# Altium PCB Lauren PCB.PcbDoc
Units mil, origin at the board's own origin, x right, y up, seen from the top; angles counter-clockwise.
Board outline 6000 x 4000 mil, 2 copper layers (Top Layer, Bottom Layer); 21 components, 24 nets, 129 pads, 33 vias.
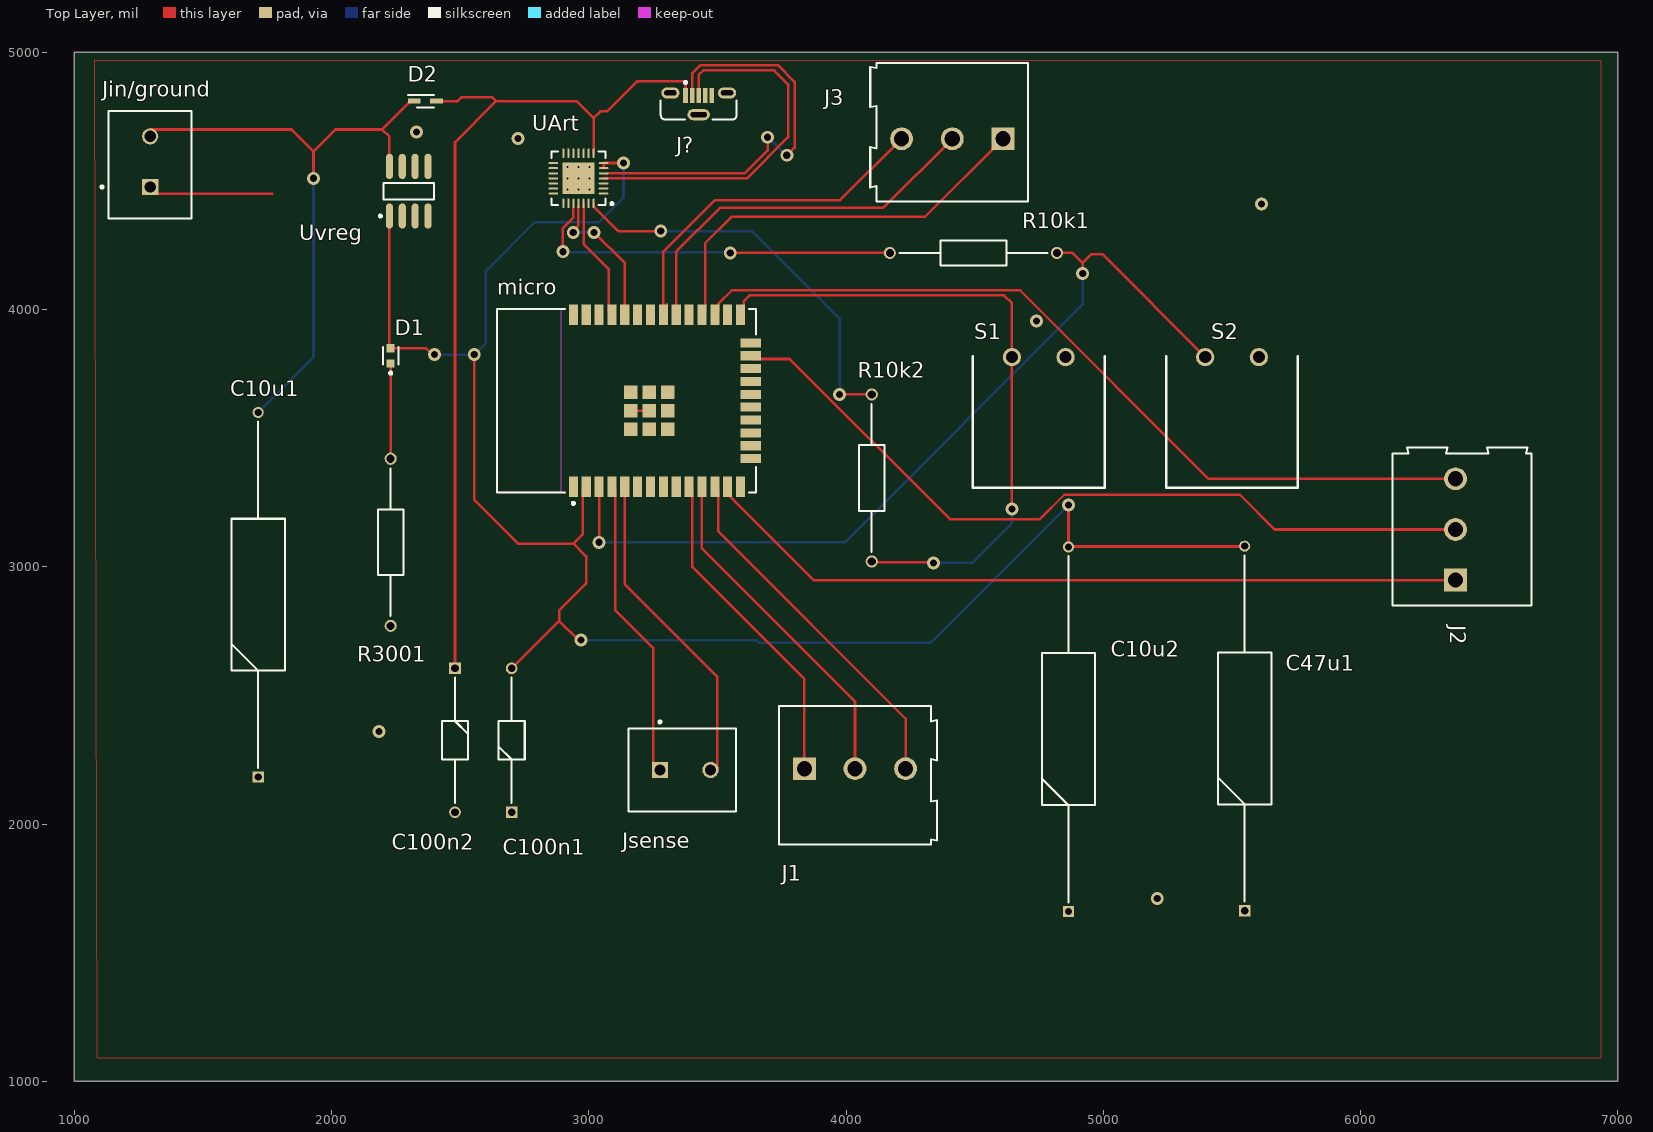
[diagram p0: Top Layer view]
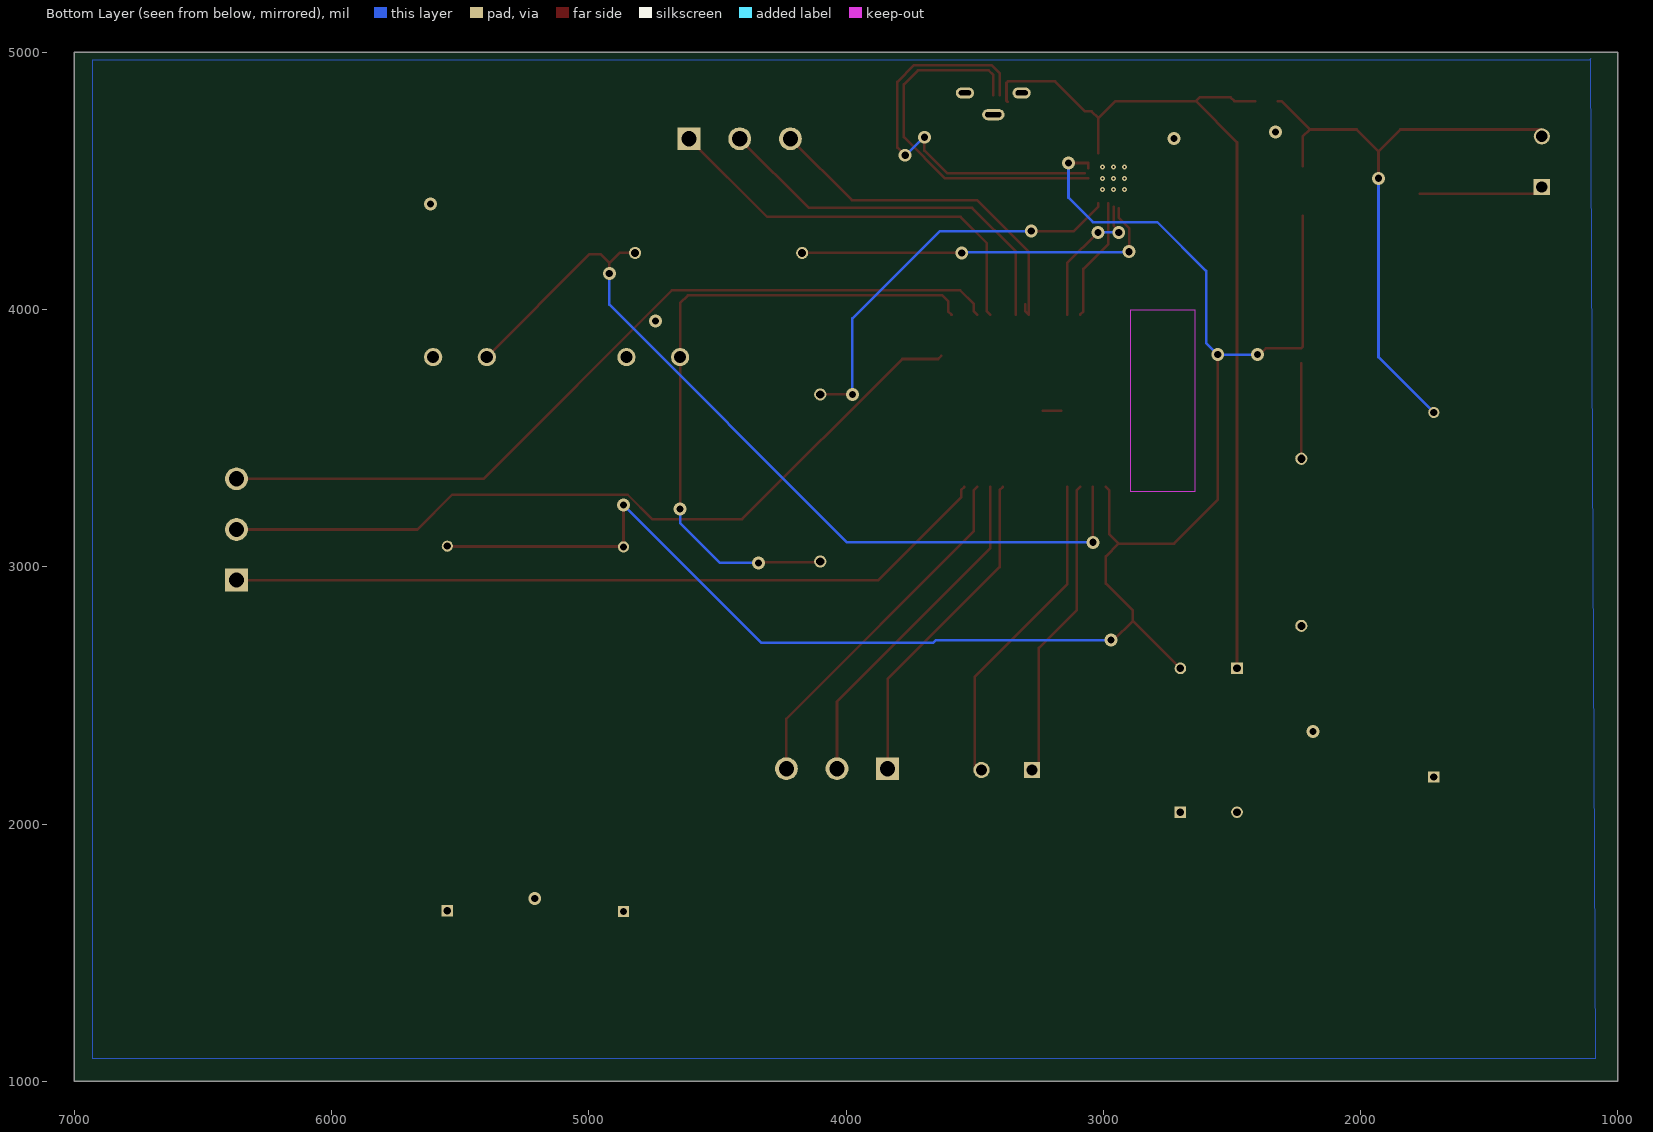
[diagram p1: Bottom Layer view, seen from below]
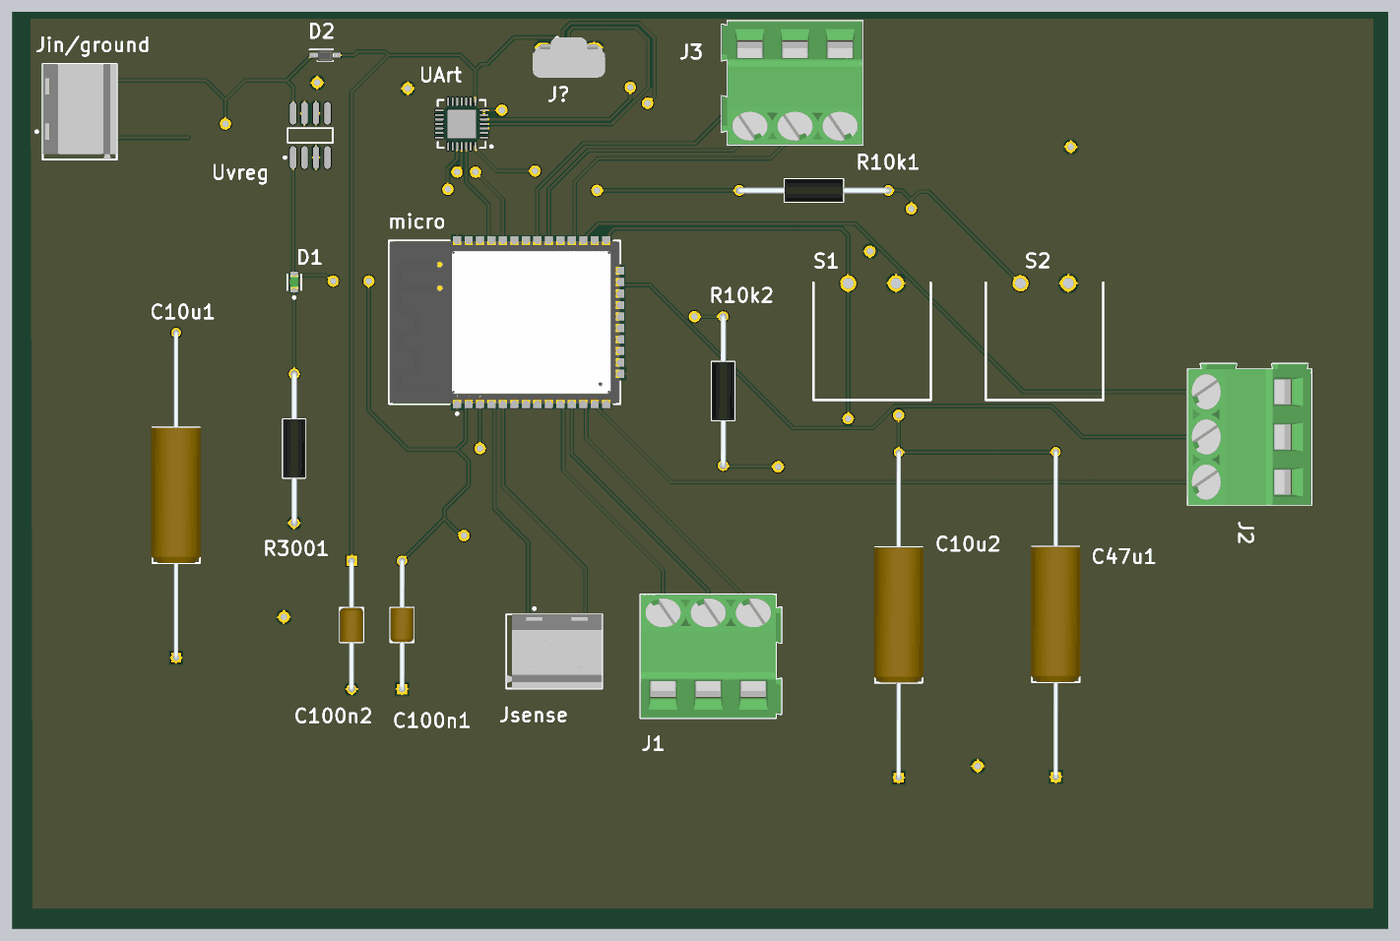
[diagram p2: 3D render of the assembled board from above, using the file's embedded part models]

## Layer stack, top to bottom
Top Solder: solder mask 0.4, Solder Resist, Dk 3.5
Top Layer: signal copper 1.4
Dielectric 1: dielectric 12.6, FR-4, Dk 4.8
Bottom Layer: signal copper 1.4
Bottom Solder: solder mask 0.4, Solder Resist, Dk 3.5

## Board outline
1000,1000 7000,1000 7000,5000 1000,5000

## Design rules (kind name [scope] priority, off if disabled: settings)
Clearance [All] p1: gap=5 ignorepadtopadclearanceinfootprint=FALSE
PolygonConnect [All] p1: connectstyle=Relief reliefconductorwidth=10 reliefentries=4 polygonreliefangle="90 Angle" airgapwidth=10
RoutingVias [All] p1: holewidth=28 width=50 viastyle="Through Hole" minholewidth=28 minwidth=50 maxholewidth=28 maxwidth=50
SolderMaskExpansion [All] p1: expansion=4 istentingtop=FALSE
Width [All] p1: maxlimit=10 minlimit=10 preferedwidth=10
30 further rules are at their usual default settings.

## Components (designator, comment, footprint, x,y, rotation, side; value= is the part's Value field where it differs from the comment)
C10u1 "106TTA050MSD" CAPPA3600W50L1500D525 1715,2182.68 r90 top
C10u2 "106TTA050MSD" CAPPA3600W50L1500D525 4865,1660 r90 top
C47u1 "106TTA050MSD" CAPPA3600W50L1500D525 5550,1662.68 r90 top
C100n1 "A104K15X7RF5UAAP" CAPPA1420W55L380D260 2700,2045.94 r90 top
C100n2 "A104K15X7RF5UAAP" CAPPA1420W55L380D260 2480,2605 r270 top
D1 "LTST-C191KGKT" FP-LTST-C191KGKT-MFG 2230,3820 r90 top
D2 "B5817WS-TP" SOD2512X115N 2365,4810 r0 top
J1 "691211720003" 691211720003 4035,2189.41 r0 top
J2 "691211720003" 691211720003 6395,3145 r90 top
J3 "691211720003" 691211720003 4413.15,4689.41 r180 top
J? "105133-0001" MOLX-105133-0001_V 3427.32,4799.76 r0 top
Jin/ground "282836-2" TECO-282836-2_V 1295,4575 r90 top (schematic designator JOut?)
Jsense "282836-2" TECO-282836-2_V 3375,2210 r0 top (schematic designator JSense)
micro "ESP32-WROOM-32" FP-ESP32-WROOM-32-MFG 3147.09,3645.35 r90 top
R10k1 "MRS25000C1002FCT00" RESAD1650W60L650D250 4820,4220 r180 top
R10k2 "MRS25000C1002FCT00" RESAD1650W60L650D250 4100,3020.39 r90 top
R3001 "MRS25000C1002FCT00" RESAD1650W60L650D250 2230,2770.39 r90 top
S1 "GPTS203211B" GPTS203211B 4749.33,3818.19 r90 top
S2 "GPTS203211B" GPTS203211B 5500.67,3818.19 r90 top
UArt "CP2102-GMR" SLAB-QFN-28-3125x3125TP_M 2960,4510 r180 top
Uvreg "LT1129CS8-3.3#TRPBF" LT-S8-8_M 2300,4460 r90 top

## Footprints (in the part's own frame and the unit in brackets; to place one, negate y for a bottom-side part, rotate by r counter-clockwise, add the part's x,y. Pads: shape width x height; smd on the part's side, far side on the other; paste and mask are expansions set on the pad)
691211720003 [mm] "5,00mm - modular - green -45¡ã entry with rising cage clamp - 03p"
  rect 2.25x2.25 hole 1.5: 1(-5,0.65)
  round 2.25 hole 1.5: 2(0,0.65) 3(5,0.65)
  silkscreen extent -7.5,-6.85 8.1,6.85, body extent -7.5,-6.85 8.1,6.85, height 15.72
CAPPA1420W55L380D260 [mm]
  rect 1.15x1.15 hole 0.75: 1(0,0)
  round 1.15 hole 0.75: 2(14.2,0)
  silkscreen extent 0.92,-1.3 13.28,1.3, body extent -0.28,-1.29 14.48,1.29, height 2.6
CAPPA3600W50L1500D525 [mm]
  rect 1.1x1.1 hole 0.7: 1(0,0)
  round 1.1 hole 0.7: 2(36,0)
  silkscreen extent 0.9,-2.63 35.1,2.63, body extent -0.25,-2.75 36.25,2.75, height 5.49
FP-ESP32-WROOM-32-MFG [mm]
  rect 2x0.9 smd paste+0 mask+0: 1(-8.5,5.26) 2(-8.5,3.99) 3(-8.5,2.72) 4(-8.5,1.45) 5(-8.5,0.18) 6(-8.5,-1.09) 7(-8.5,-2.36) 8(-8.5,-3.63) 9(-8.5,-4.9) 10(-8.5,-6.17) 11(-8.5,-7.44) 12(-8.5,-8.71) 13(-8.5,-9.98) 14(-8.5,-11.25) 25(8.5,-11.25) 26(8.5,-9.98) 27(8.5,-8.71) 28(8.5,-7.44) 29(8.5,-6.17) 30(8.5,-4.9) 31(8.5,-3.63) 32(8.5,-2.36) 33(8.5,-1.09) 34(8.5,0.18) 35(8.5,1.45) 36(8.5,2.72) 37(8.5,3.99) 38(8.5,5.26)
  rect 0.9x2 smd paste+0 mask+0: 15(-5.715,-12.25) 16(-4.445,-12.25) 17(-3.175,-12.25) 18(-1.905,-12.25) 19(-0.635,-12.25) 20(0.635,-12.25) 21(1.905,-12.25) 22(3.175,-12.25) 23(4.445,-12.25) 24(5.715,-12.25)
  rect 1.33x1.33 smd paste+0 mask+0: 39(-2.835,-2.24) 39(-2.835,-0.405) 39(-2.835,-4.075) 39(-1,-0.405) 39(-1,-4.075) 39(-1,-2.24) 39(0.835,-0.405) 39(0.835,-4.075) 39(0.835,-2.24)
  Keep-Out Layer region: -9,6.45 9,6.45 9,12.75 -9,12.75
  Keep-Out Layer region: -9,6.45 9,6.45 9,12.75 -9,12.75
  silkscreen extent -10.25,-12.8 9.05,12.8, body extent -9.6,-13.35 9.6,12.9, height 0.25
FP-LTST-C191KGKT-MFG [mm]
  rect 0.8x0.8 smd paste+0 mask+0: 1(-0.75,0) 2(0.75,0)
  silkscreen extent -1.82,-0.77 0.85,0.77, body extent -1.25,-0.55 1.25,0.55, height 0.25
GPTS203211B [mm]
  round 1.8 hole 1.2: 1(-0.081,-2.65) 2(-0.081,2.65)
  silkscreen extent -13,-6.5 0,6.5
LT-S8-8_M [mm] "SOIC, 8-Leads, Body 4.9x3.9mm, Pitch 1.27mm, IPC Low Density"
  oval 2.5x0.7 smd: 1(-2.45,1.905) 2(-2.45,0.635) 3(-2.45,-0.635) 4(-2.45,-1.905) 5(2.45,-1.905) 6(2.45,-0.635) 7(2.45,0.635) 8(2.45,1.905)
  silkscreen extent -2.57,-2.5 0.8,2.93, body extent -2,-2.5 2,2.5, height 1.76
MOLX-105133-0001_V [mm] "Micro USB B, 5-Leads, Pitch 0.65mm"
  rect 0.45x1.5 smd: 1(-1.3,0.825) 2(-0.65,0.825) 3(0,0.825) 4(0.65,0.825) 5(1.3,0.825)
  oval 1.8x1.1 hole 0.5 slot 1.2 at 0 deg: 6(-2.8,1.075) 7(2.8,1.075)
  oval 2.2x1.1 hole 0.5 slot 1.6 at 0 deg: 8(0,-1.075)
  silkscreen extent -3.75,-1.56 3.75,2.25, body extent -4.02,-2.22 4,2.23, height 7.51
RESAD1650W60L650D250 [mm]
  round 1.2 hole 0.8: 1(0,0) 2(16.5,0)
  silkscreen extent 0.95,-1.25 15.55,1.25, body extent -0.3,-1.24 16.8,1.24, height 2.5
SLAB-QFN-28-3125x3125TP_M [mm] "QFN, 28-Leads, Body 5x5mm, Pitch 0.5mm, Thermal Pad 3.13x3.13mm, IPC Low Density"
  oval 0.95x0.2 smd: 1(-2.475,1.5) 2(-2.475,1) 3(-2.475,0.5) 4(-2.475,0) 5(-2.475,-0.5) 6(-2.475,-1) 7(-2.475,-1.5) 15(2.475,-1.5) 16(2.475,-1) 17(2.475,-0.5) 18(2.475,0) 19(2.475,0.5) 20(2.475,1) 21(2.475,1.5)
  oval 0.2x0.95 smd: 8(-1.5,-2.475) 9(-1,-2.475) 10(-0.5,-2.475) 11(0,-2.475) 12(0.5,-2.475) 13(1,-2.475) 14(1.5,-2.475) 22(1.5,2.475) 23(1,2.475) 24(0.5,2.475) 25(0,2.475) 26(-0.5,2.475) 27(-1,2.475) 28(-1.5,2.475)
  rect 3.13x3.13 smd: 29(0,0)
  silkscreen extent -3.42,-2.65 2.65,2.65, body extent -2.5,-2.5 2.5,2.5, height 1
SOD2512X115N [mm]
  rect 1.25x0.5 smd: 1(-1.1,0) 2(1.1,0)
  silkscreen extent -1.73,-0.63 0.85,0.63, body extent -1.25,-0.63 1.25,0.63, height 1.15
TECO-282836-2_V [mm] "Female Header, Pitch 5mm, 1 x 2 Position, Height 10mm"
  rect 1.6x1.6 hole 1.1: 1(-2.5,0)
  round 1.6 hole 1.1: 2(2.5,0)
  silkscreen extent -5.6,-4.1 5,4.87, body extent -5.6,-4.1 5,4.1, height 10

## Part data
C10u1 C10u2 C47u1: "Capacitor Polarised", Manufacturer_Name="Cornell Dubilier", Mouser Part Number=598-106TTA050MSD, Arrow Part Number=106TTA050MSD, Arrow Price/Stock=https://www.arrow.com/en/products/106tta050msd/illinois-capacitor?region=nac, Datasheet Link=https://www.mouser.co.uk/datasheet/2/88/TTA_series-552998.pdf, Manufacturer_Part_Number=106TTA050MSD, Mouser Price/Stock=https://www.mouser.com/Search/Refine.aspx?Keyword=598-106TTA050MSD
C100n1 C100n2: "Capacitor", Manufacturer_Name=Vishay, Mouser Part Number=594-A104K15X7RF5UAAP, Datasheet Link=https://www.vishay.com/docs/45249/apseries.pdf, Manufacturer_Part_Number=A104K15X7RF5UAAP, Mouser Price/Stock=https://www.mouser.co.uk/ProductDetail/Vishay-BC-Components/A104K15X7RF5UAAP?qs=DPoM0jnrROUJ7499VET5BQ%3D%3D
D1: library part CMP-2000-05198-2, "LED GREEN CLEAR SMD", Case Code (Imperial)=0603, Case Code (Metric)=1608, Color=Green, Forward Current=30mA, Forward Voltage=2V, Lens Color=Colorless, Max Operating Temperature=85°C, Max Power Dissipation=75mW, Min Operating Temperature=-55°C, Package Quantity=1, Reverse Voltage=5V, Test Current=20mA, Case/Package=0603, Depth=0.8mm, Dominant Wavelength=571nm, Height=0.55mm, Illumination Color=Green, Lead Free="Lead Free", Length=1.6mm, Lens Style=Rectangular, Lens Transparency=Clear, Luminous Intensity=35mcd, Mount="Surface Mount", Number of Elements=1, Number of LEDs=1, Number of Pins=2, Packaging="Tape and Reel", Power Dissipation=75mW, Power Rating=75mW, Radiation Hardening=No, Viewing Angle=130°, Wavelength=574nm, Width=0.8mm
D2: "Schottky Diode", Manufacturer_Name="Micro Commercial Components (MCC)", Mouser Part Number=833-B5817WS-TP, Arrow Part Number=B5817WS-TP, Arrow Price/Stock=https://www.arrow.com/en/products/b5817ws-tp/micro-commercial-components?region=europe, Datasheet Link=https://www.mouser.co.uk/datasheet/2/258/B5817WS-B5819WS(SOD-323)-V2-1626103.pdf, Height=1.15mm, Manufacturer_Part_Number=B5817WS-TP, Mouser Price/Stock=https://www.mouser.co.uk/ProductDetail/Micro-Commercial-Components-MCC/B5817WS-TP?qs=SdqRYZZ9IxCAZAlW9BKhPg%3D%3D
J1 J2 J3: library part CMP-1502-02525-1, "Serie 211 - 5.00 mm 45deg Entry Modular with Rising Cage Clamp - 15.50 mm Height WR-TBL, 3 pin", Manufacturer="Wurth Elektronik", Operating Temperature=-40to105degC, Datasheet URL=http://katalog.we-online.de/em/datasheet/6912117200xx.pdf, Manufacturer URL=http://www.we-online.de, Mounting Technology=THT, Package Reference=691211720003, Packaging=Box, Part Number=691211720003, Pin Number=3, Pitch=5.00mm, Publisher=WurthElektronik
J?: library part CMP-2000-05829-1, "Micro-USB B Receptacle, Vertical, -30 to 85 degC, 5-Pin SMD, RoHS, Tape and Reel", Color=Black, Current Rating=1.8A, Flammability Rating=UL94V-0, Manufacturer=Molex, Package Description="5-Pin Surface Mount Device, Pitch 0.65 mm", Package Version="Rev. C, 11/2015", Voltage - Max=30V, Voltage Rating=30VAC, Brand=Molex, Connector Type=MicroUSBTypeBReceptacle, Contact Material=CopperAlloy, Contact Plating=Gold, Datasheet URL=http://www.molex.com/webdocs/datasheets/pdf/en-us/1051330001_IO_CONNECTORS.pdf, Datasheet Version=03/2016, Factory Pack Quantity=6000, Gender=Receptacle, Manufacturer URL=http://www.molex.com/, Mounting Angle=Vertical, Mounting Style=SMD/SMT, Mounting Technology=SurfaceMount, Number of Ports=1, Package Reference=105133-0001, Package URL=http://www.molex.com/pdm_docs/sd/1051330001_sd.pdf, Packaging=Reel, PartNumber=105133-0001, Product=MicroUSBTypeBConnectors, Product Category=USBConnectors, RoHS=Details, Series=105133, Standard=USB, Termination Style=SolderTail
Jin/ground Jsense: library part CMP-1684-00017-1, "Female Header, Pitch 5 mm, 1 x 2 Position, Height 10 mm, Tail Length 3.5 mm, Rohs, Bulk", Color=Green, Current=13.5A, Manufacturer="TE Connectivity", Package Description="Female Header, Pitch 5 mm, 1 x 2 Position, Height 10 mm, Tail Length 3.5 mm", Package Reference=THD, Standard Package=300, Voltage=300V, 3D Model=282836-2.pdf, Category=Connectors,Interconnects, Clamp Material - Plating=Brass-NickelPlated, Contact Material - Plating=Brass-TinPlated, Datasheet URL=http://www.te.com.cn/commerce/DocumentDelivery/DDEController?Action=showdoc&DocId=Catalog+Section%7F1308389_EUROSTYLE_TERMINAL_BLOCKS%7F0607%7Fpdf%7FEnglish%7FENG_CS_1308389_EUROSTYLE_TERMINAL_BLOCKS_0607.pdf%7F282836-2, Dynamic Catalog=BuchananSeries, Family=TerminalBlocks-WiretoBoard, Featured Product=EurostyleTerminalBlockConnectors, Features=Interlocking(Side), Housing Material=Polyamide(PA66),Nylon6/6, Manufacturer URL=http://www.te.com, Mating Orientation=HorizontalwithBoard, Mounting Type=ThroughHole, Number of Levels=1, Other Names="5ULV-02B / A98076", Packaging=Bulk, Pitch="0.197\"(5.00mm)", Positions Per Level=2, Product Training Modules=Wire-to-BoardEurostyleTerminalBlocks, RoHS Information=282836-2StatementofCompliance, Screw Material - Plating=Brass-NickelPlated, Screw Thread=M3, Series=Buchanan, Torque - Screw=0.68Nm(6Lb-In), Wire Gauge=16-30AWG, Wire Termination=Screw-RisingCageClamp
micro: library part CMP-194065-000008-1, "RX TXRX MOD WIFI SURFACE MOUNT", Case/Package=SMD/SMT, Frequency=2.5GHz, Max Operating Temperature=85°C, Min Operating Temperature=-40°C, Operating Supply Voltage=3.6V, Package Quantity=550, Data Rate=150Mbps, Mount="Surface Mount", Packaging="Cut Tape", Sensitivity=-98dBm, Weight=0.088185oz
R10k1 R10k2 R3001: "Resistor", Manufacturer_Name=Vishay, Mouser Part Number=594-MRS25000C1002FCT, Arrow Part Number=MRS25000C1002FCT00, Arrow Price/Stock=https://www.arrow.com/en/products/mrs25000c1002fct00/vishay?region=nac, Datasheet Link=http://www.vishay.com/docs/28724/mrs16m25.pdf, Manufacturer_Part_Number=MRS25000C1002FCT00, Mouser Price/Stock=https://www.mouser.co.uk/ProductDetail/Vishay-BC-Components/MRS25000C1002FCT00?qs=H30XFsNYD%2FEwip42ZXddDQ%3D%3D
S1 S2: "Switch", Manufacturer_Name="CW Industries", Mouser Part Number=629-GPTS203211B, Datasheet Link=http://switches-connectors-custom.cwind.com/Asset/GPTS203211BR2.pdf, Manufacturer_Part_Number=GPTS203211B, Mouser Price/Stock=https://www.mouser.co.uk/ProductDetail/CW-Industries/GPTS203211B?qs=sajaCoHCXPR%252BmLwibobs6Q%3D%3D
UArt: library part CMP-2000-04924-1, "Single-Chip USB to URAT Bridge, 3.3 V, -40 to 85 degC, 28-Pin QFN, RoHS, Tape and Reel", Manufacturer="Silicon Labs", Operating Supply Voltage (Max)=3.6V, Operating Supply Voltage (Min)=3V, Operating Supply Voltage (Typ)=3.3V, Operating Temperature (Max)=85C, Operating Temperature (Min)=-40C, Operating Temperature Classification=Industrial, Package Description="28-Pin Quad-Flat No-Leads Package, Body 5 x 5 mm, Pitch 0.5 mm", Package Reference=QFN-28, Package Type=QFNEP, Supply Current=26mA, Data Rate=1000kbps, Datasheet URL=http://www.mouser.com/ds/2/368/CP2102-9-247052.pdf, Datasheet Version="Rev. 1.6, 12/2013", Interface Circuit Standard 1=RS-232, Manufacturer URL=http://www.silabs.com/, Mounting=SurfaceMount, Number Of Channels=1, Package URL=http://www.silabs.com/Support%20Documents/TechnicalDocs/C8051T61x.pdf, Packaging=TapeandReel, Pin Count=28, Rad Hardened=No, Transmitter and Receiver FIFO Counter=No
Uvreg: library part CMP-0476-01546-1, "Micropower Low Dropout Regulator with Shutdown, 4.15 to 30 V Vin, 3.3 V Vout, 8-pin SOIC (S8-8), 0 to 125 degC, Pb-Free, Tape and Reel", Dropout Voltage(V)=0.45, Manufacturer="Linear Technology", Output Voltage="3.3 V", Shutdown Current(uA)=16, ComponentLink1Description="Manufacturer URL", ComponentLink1URL=http://www.linear.com/, ComponentLink2Description=Datasheet, ComponentLink2URL=http://cds.linear.com/docs/en/datasheet/112935ff.pdf, ComponentLink3Description="Package Specification", ComponentLink3URL=http://cds.linear.com/docs/en/packaging/05081610_G_SO8.pdf, DatasheetVersion="Rev. F", Discrete Pass Element=no, Iout(mA)=700, Isupply(mA)=0.05, Mounting Technology="Surface Mount", Number of Outputs=1, PackageDescription="8-Pin Plastic Small Outline (Narrow .150 Inch), Body 4.9 x 3.9 mm, Pitch 1.27 mm", PackageReference=S8-8, PackageVersion="Rev. G, 03/2012", Packing="Tape and Reel", PartNumber=LT1129CS8-3.3#TRPBF, PSRR(dB)=64, RoHS=TRUE, Vin Max(V)=30, Vin Min(V)=4.15

## Via types
v1: diameter 50, hole 28, Top Layer to Bottom Layer, 24 vias
v2: diameter 19.68, hole 7.87, Top Layer to Bottom Layer, 9 vias

## Nets (pads, with @x,y where several pads share a name; then routed paths per layer and width w, separated by ;. In a path a pad name is that pad's centre, name@x,y a point inside that pad or via, vN(x,y) a via of type N, cw(c..) or ccw(c..) an arc to the next point about the centre after c; other vN are vias at no path point)
GND: C10u1.1 C10u2.1 C47u1.1 C100n1.1 C100n2.2 J?.5 J?.6 J?.7 J?.8 Jin/ground.1 micro.1 micro.15 micro.38 micro.39 R3001.1 S1.1 S2.1 UArt.3 UArt.29 Uvreg.3 Uvreg.6 Uvreg.7 | length 547.2
  Top Layer w10: Jin/ground.1@1295,4450 1770,4450 ; micro.39@3163.03,3605.98 micro.39@3235.28,3605.98
  other v1: 5210,1710 2185,2360 4740,3955 5615,4410 2725,4665 2330,4690
  other v2: 2916.69,4466.69 2960,4466.69 3003.31,4466.69 2916.69,4510 2960,4510 3003.31,4510 2916.69,4553.31 2960,4553.31 3003.31,4553.31
NetC10u1_2: C10u1.2 D2.1 Jin/ground.2 Uvreg.8 | length 2401.9
  Top Layer w10: Jin/ground.2@1295,4700 1845,4700 1930,4615 ; v1(1930,4510) 1930,4615 ; Uvreg.8 2225,4671.93 2196.93,4700 ; D2.1 2306.93,4810 2196.93,4700 ; 1930,4615 2015,4700 2196.93,4700
  Bottom Layer w10: C10u1.2 1930,3815 v1(1930,4510)
NetC10u2_2: C10u2.2 C47u1.2 C100n1.2 D1.2 micro.2 UArt.6 UArt.7 Uvreg.1 | length 7053.8
  Top Layer w10: Uvreg.1 2225,3854.53 D1.2 2367.96,3849.53 2392.49,3825 v1(2400,3825) ; v1(2555,3825) 2555,3260 2725,3090 2940,3090 ; C100n1.2 2885,2790 ; v1(2970,2715) 2960,2715 2885,2790 ; micro.2 2977.28,3297.99 2977.28,3127.28 2940,3090 ; UArt.6 UArt.7 3057.91,4569.53 3134.53,4569.53 v1(3135,4570) ; v1(4865,3240) C10u2.2 4866.34,3078.66 5548.66,3078.66 C47u1.2 ; 2885,2790 2885,2830 2990,2935 2990,3040 2940,3090
  Bottom Layer w10: v1(2400,3825) v1(2555,3825) 2600,3870 2600,4150 2790,4340 3040,4340 3135,4435 v1(3135,4570) ; v1(2970,2715) 3650.41,2715 3660.41,2705 4330,2705 v1(4865,3240)
NetC100n2_1: C100n2.1 D2.2 J?.1 UArt.8 | length 3552.1
  Top Layer w10: D2.2 2490,4810 2505,4825 2625,4825 2640,4810 ; C100n2.1 2480,4650 2640,4810 ; UArt.8 3019.06,4744.06 ; J?.1@3372.28,4807.72 3376.14,4811.57 J?.1 3376.14,4881.14 3370.28,4887 3187,4887 3070,4770 3045,4770 3019.06,4744.06 ; 2640,4810 2953.11,4810 3019.06,4744.06
NetD1_1: D1.1 R3001.2 | length 370.5
  Top Layer w10: R3001.2 D1.1
NetJ1_1: J1.1 micro.10 | length 1281.3
  Top Layer w10: micro.10 3402.72,3297.99 3402.72,2999.15 3838.15,2563.72 J1.1
NetJ1_2: J1.2 micro.11 | length 1342.2
  Top Layer w10: micro.11 3440,3071.28 4035,2476.28 J1.2
NetJ1_3: J1.3 micro.12 | length 1403
  Top Layer w10: micro.12 3502.72,3297.99 3502.72,3138.35 4231.85,2409.21 J1.3
NetJ2_1: J2.1 micro.13 | length 2996.2
  Top Layer w10: micro.13 3552.72,3297.99 3552.72,3269.69 3874.26,2948.15 J2.1
NetJ2_2: J2.2 micro.23 | length 3098.5
  Top Layer w10: micro.23 3642.09,3807.64 3780.79,3807.64 4403.43,3185 4753.43,3185 4848.43,3280 5530.79,3280 5665.79,3145 J2.2
NetJ2_3: J2.3 micro.27 | length 3239
  Top Layer w10: micro.27 3502.72,3992.72 3502.72,4021.02 3556.7,4075 4676.57,4075 5409.72,3341.85 J2.3
NetJ3_1: J3.1 micro.28 | length 1608.5
  Top Layer w10: micro.28 3452.72,3992.72 3452.72,4257.72 3555,4360 4306.18,4360 J3.1
NetJ3_2: J3.2 micro.30 | length 1499.9
  Top Layer w10: micro.30 3340,4225 3510,4395 4144.33,4395 J3.2
NetJ3_3: J3.3 micro.31 | length 1399.3
  Top Layer w10: 3302.72,4021.02 3302.72,3992.72 micro.31 3290,4225 3490,4425 3977.48,4425 J3.3
NetJ?_2: J?.2 UArt.5 | length 1637
  Top Layer w10: UArt.5@3071.14,4530 3606.72,4530 3695,4618.28 v1(3695,4670) ; J?.2 3401.73,4916.73 3435,4950 3735,4950 3800,4885 3800,4630 v1(3770,4600)
  Bottom Layer w10: v1(3695,4670) 3697.5,4670 3767.5,4600 v1(3770,4600)
NetJ?_3: J?.3 UArt.4 | length 1446.7
  Top Layer w10: UArt.4 3615,4510 3775,4670 3775,4875 3720,4930 3445,4930 3427.32,4912.32 J?.3
NetJsense_1: Jsense.1 micro.4 | length 1167
  Top Layer w10: micro.4 3102.72,3297.99 3102.72,2832.03 3250,2684.74 Jsense.1@3250,2210
NetJsense_2: Jsense.2 micro.5 | length 1249.8
  Top Layer w10: micro.5 3140,2931.4 3500,2571.4 Jsense.2@3500,2210
Netmicro_3: micro.3 R10k1.1 S2.2 | length 3412.7
  Top Layer w10: v1(3040,3095) micro.3 ; R10k1.1 4880,4220 4920,4180 ; v1(4920,4140) 4920,4180 ; S2.2 4996.34,4215 4955,4215 4920,4180
  Bottom Layer w10: v1(3040,3095) 3996.32,3095 4920,4018.68 v1(4920,4140)
Netmicro_25: micro.25 R10k2.1 S1.2 | length 2588.4
  Top Layer w10: micro.25 3602.72,3992.72 3602.72,4032.72 3625,4055 4615,4055 4645,4025 S1.2 v1(4645,3225) ; R10k2.1 4102.7,3017.7 4337.3,3017.7 v1(4340,3015)
  Bottom Layer w10: v1(4340,3015) 4490,3015 4645,3170 v1(4645,3225)
Netmicro_34: micro.34 UArt.25 | length 557
  Top Layer w10: v1(2939.68,4300) 2939.68,4306.29 2959.25,4325.86 UArt.25@2959.25,4398.86 ; v1(3020,4300) 3140,4180 micro.34
  Bottom Layer w10: v1(2939.68,4300) v1(3020,4300)
Netmicro_35: micro.35 UArt.26 | length 478.3
  Top Layer w10: UArt.26 2979.68,4255.41 3077.28,4157.81 3077.28,3992.72 micro.35
NetR10k1_2: R10k1.2 UArt.24 | length 1458.3
  Top Layer w10: v1(2900,4225) 2899.68,4225.31 2899.68,4316.57 2939.25,4356.14 UArt.24@2939.25,4394.36 ; v1(3550,4220) R10k1.2
  Bottom Layer w10: v1(2900,4225) 2902.5,4222.5 3547.5,4222.5 v1(3550,4220)
NetR10k2_2: R10k2.2 UArt.28 | length 1568.7
  Top Layer w10: UArt.28 3019.06,4399.92 3113.98,4305 v1(3280,4305) ; v1(3975,3670) R10k2.2
  Bottom Layer w10: v1(3280,4305) 3635,4305 3975,3965 v1(3975,3670)
pads on no net: J?.4 micro.6 micro.7 micro.8 micro.9 micro.14 micro.16 micro.17 micro.18 micro.19 micro.20 micro.21 micro.22 micro.24 micro.26 micro.29 micro.32 micro.33 micro.36 micro.37 UArt.1 UArt.2 UArt.9 UArt.10 UArt.11 UArt.12 UArt.13 UArt.14 UArt.15 UArt.16 UArt.17 UArt.18 UArt.19 UArt.20 UArt.21 UArt.22 UArt.23 UArt.27 Uvreg.2 Uvreg.4 Uvreg.5

## Polygon pours and split planes (outlines as drawn)
GND on Top Layer "NONET_L01_P000" (solid, shelved, pour order 0): 1080,4970 6935,4970 6935,1090 1090,1090
GND on Bottom Layer "NONET_L02_P001" (solid, shelved, pour order 1): 1105,4975 1110,4970 6930,4970 6930,1090 1085,1090